# Altium PCB mchf_pro_rf.PcbDoc (part 1 of 4)
Units mm, origin at the board's own origin, x right, y up, seen from the top; angles counter-clockwise.
Board outline 200 x 140.01 mm, 2 copper layers (Top Layer, Bottom Layer); 387 components, 251 nets, 1103 pads, 620 vias.
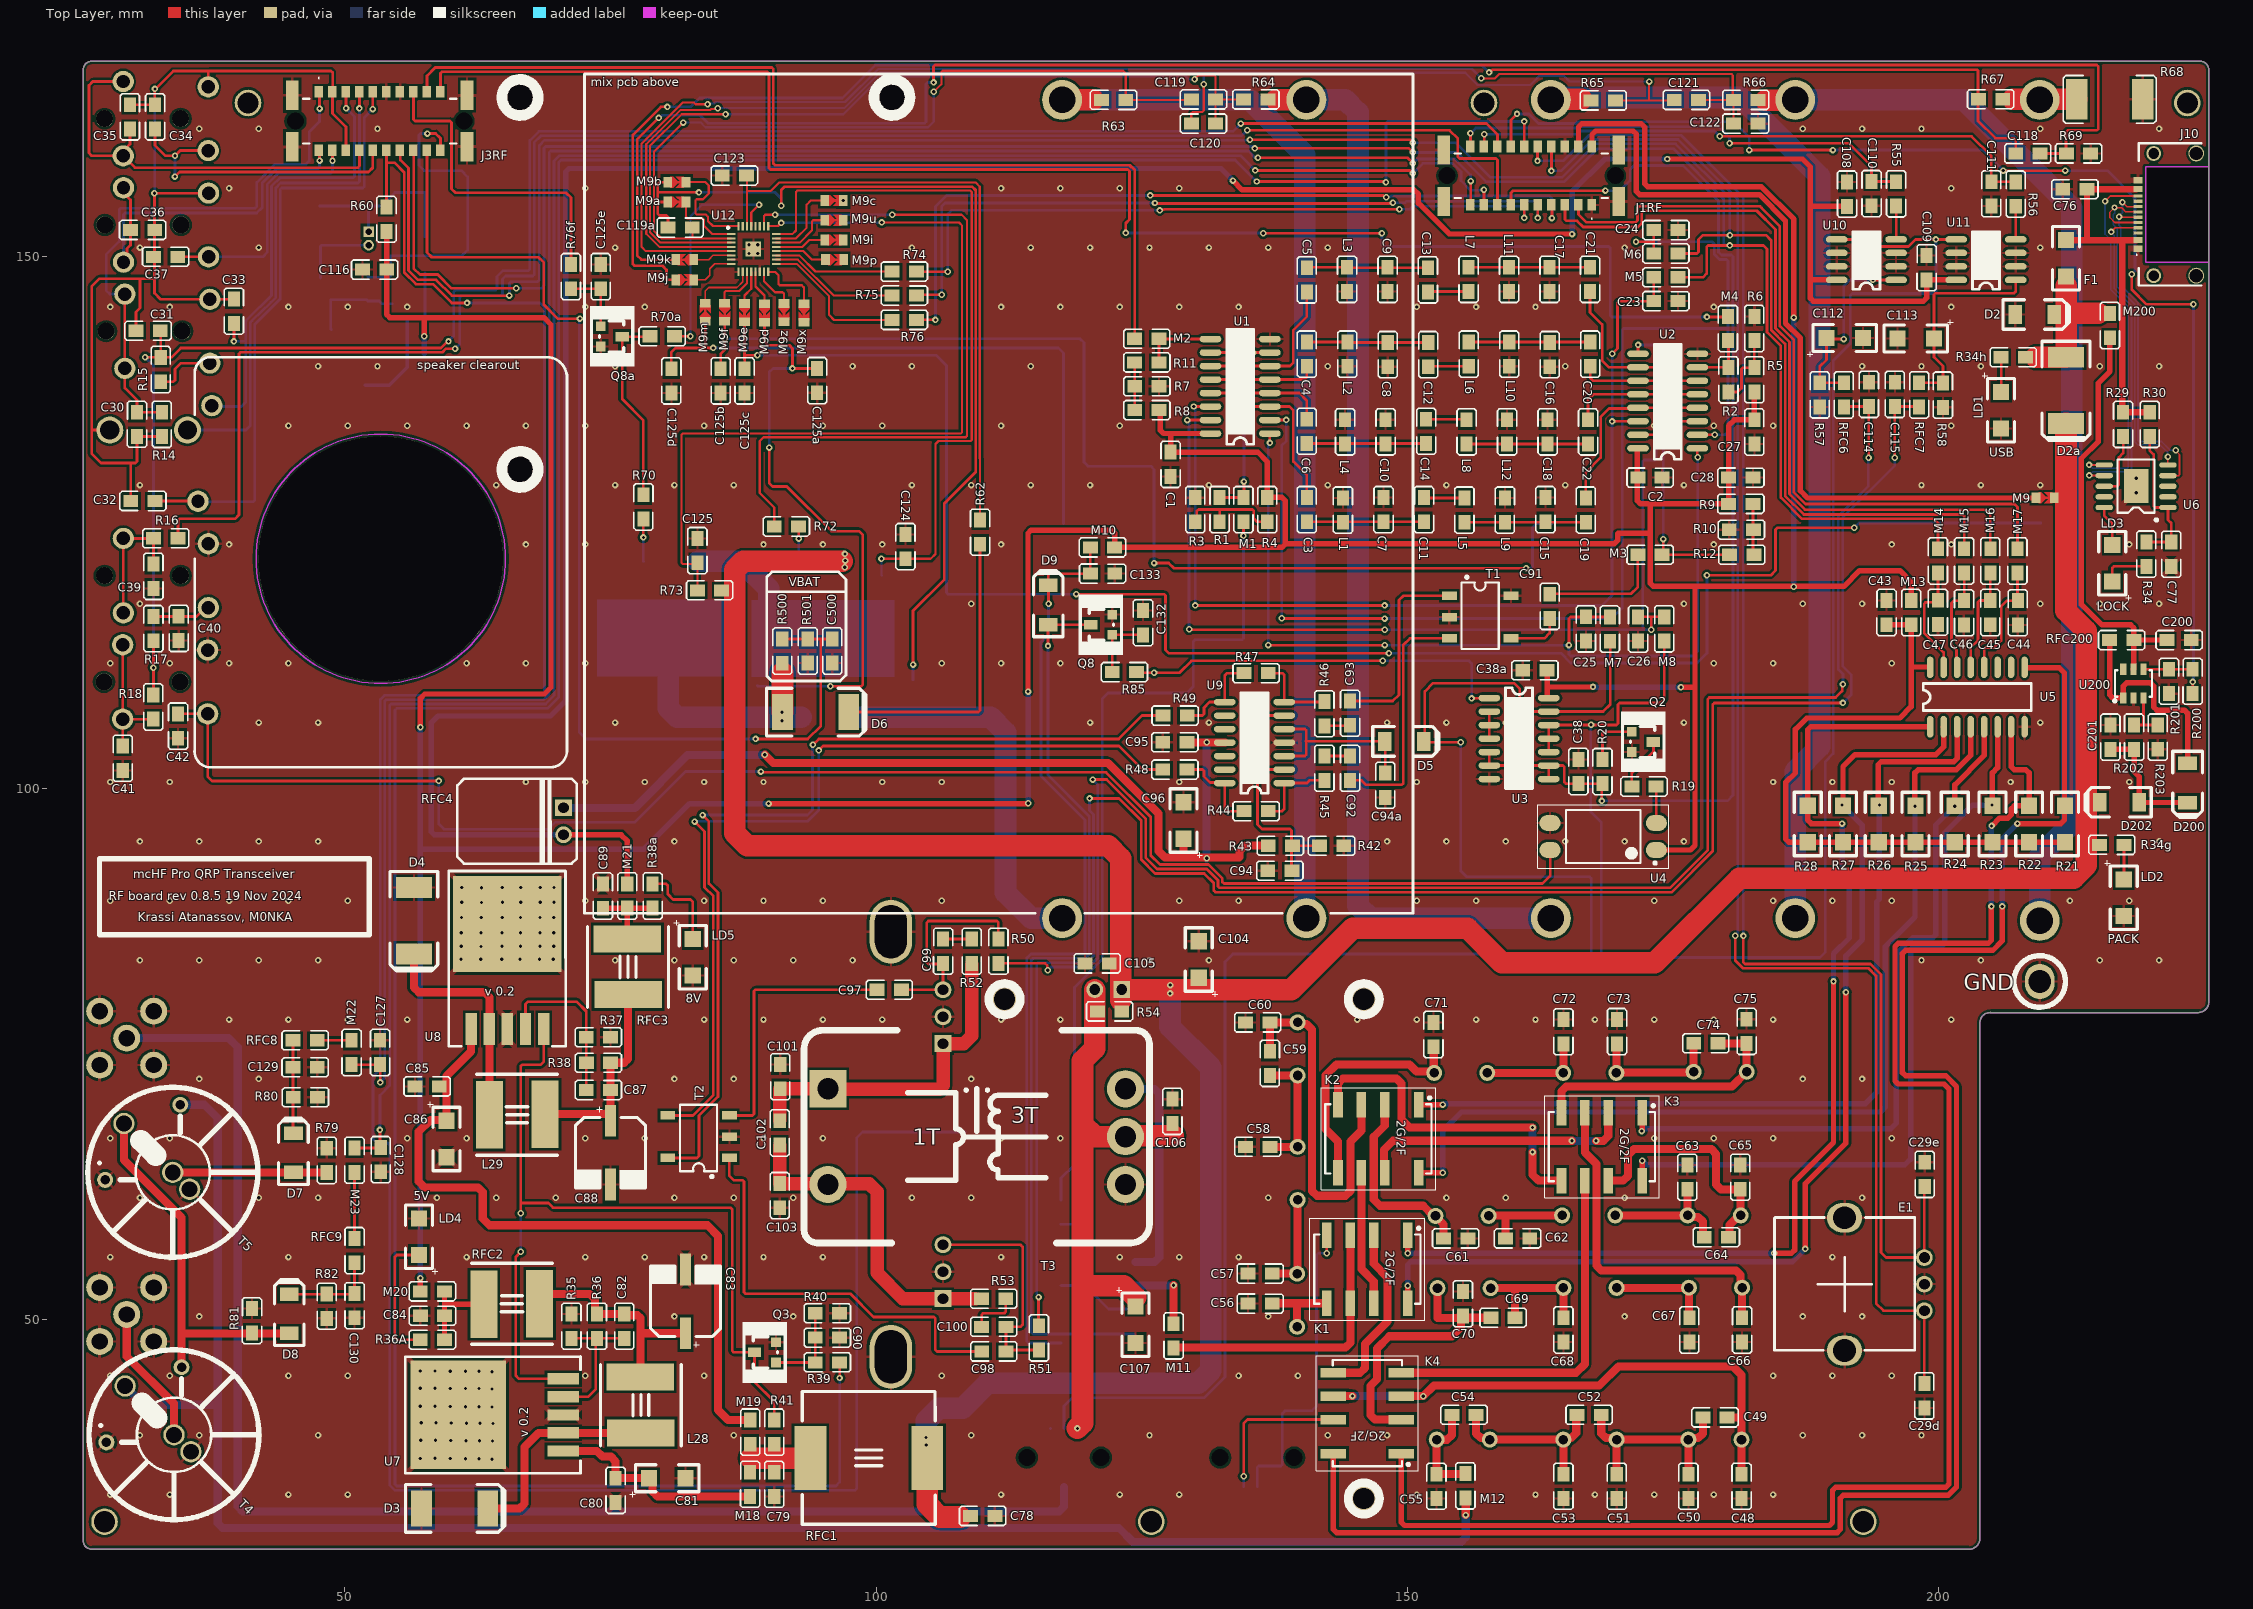
[diagram p0: Top Layer view]
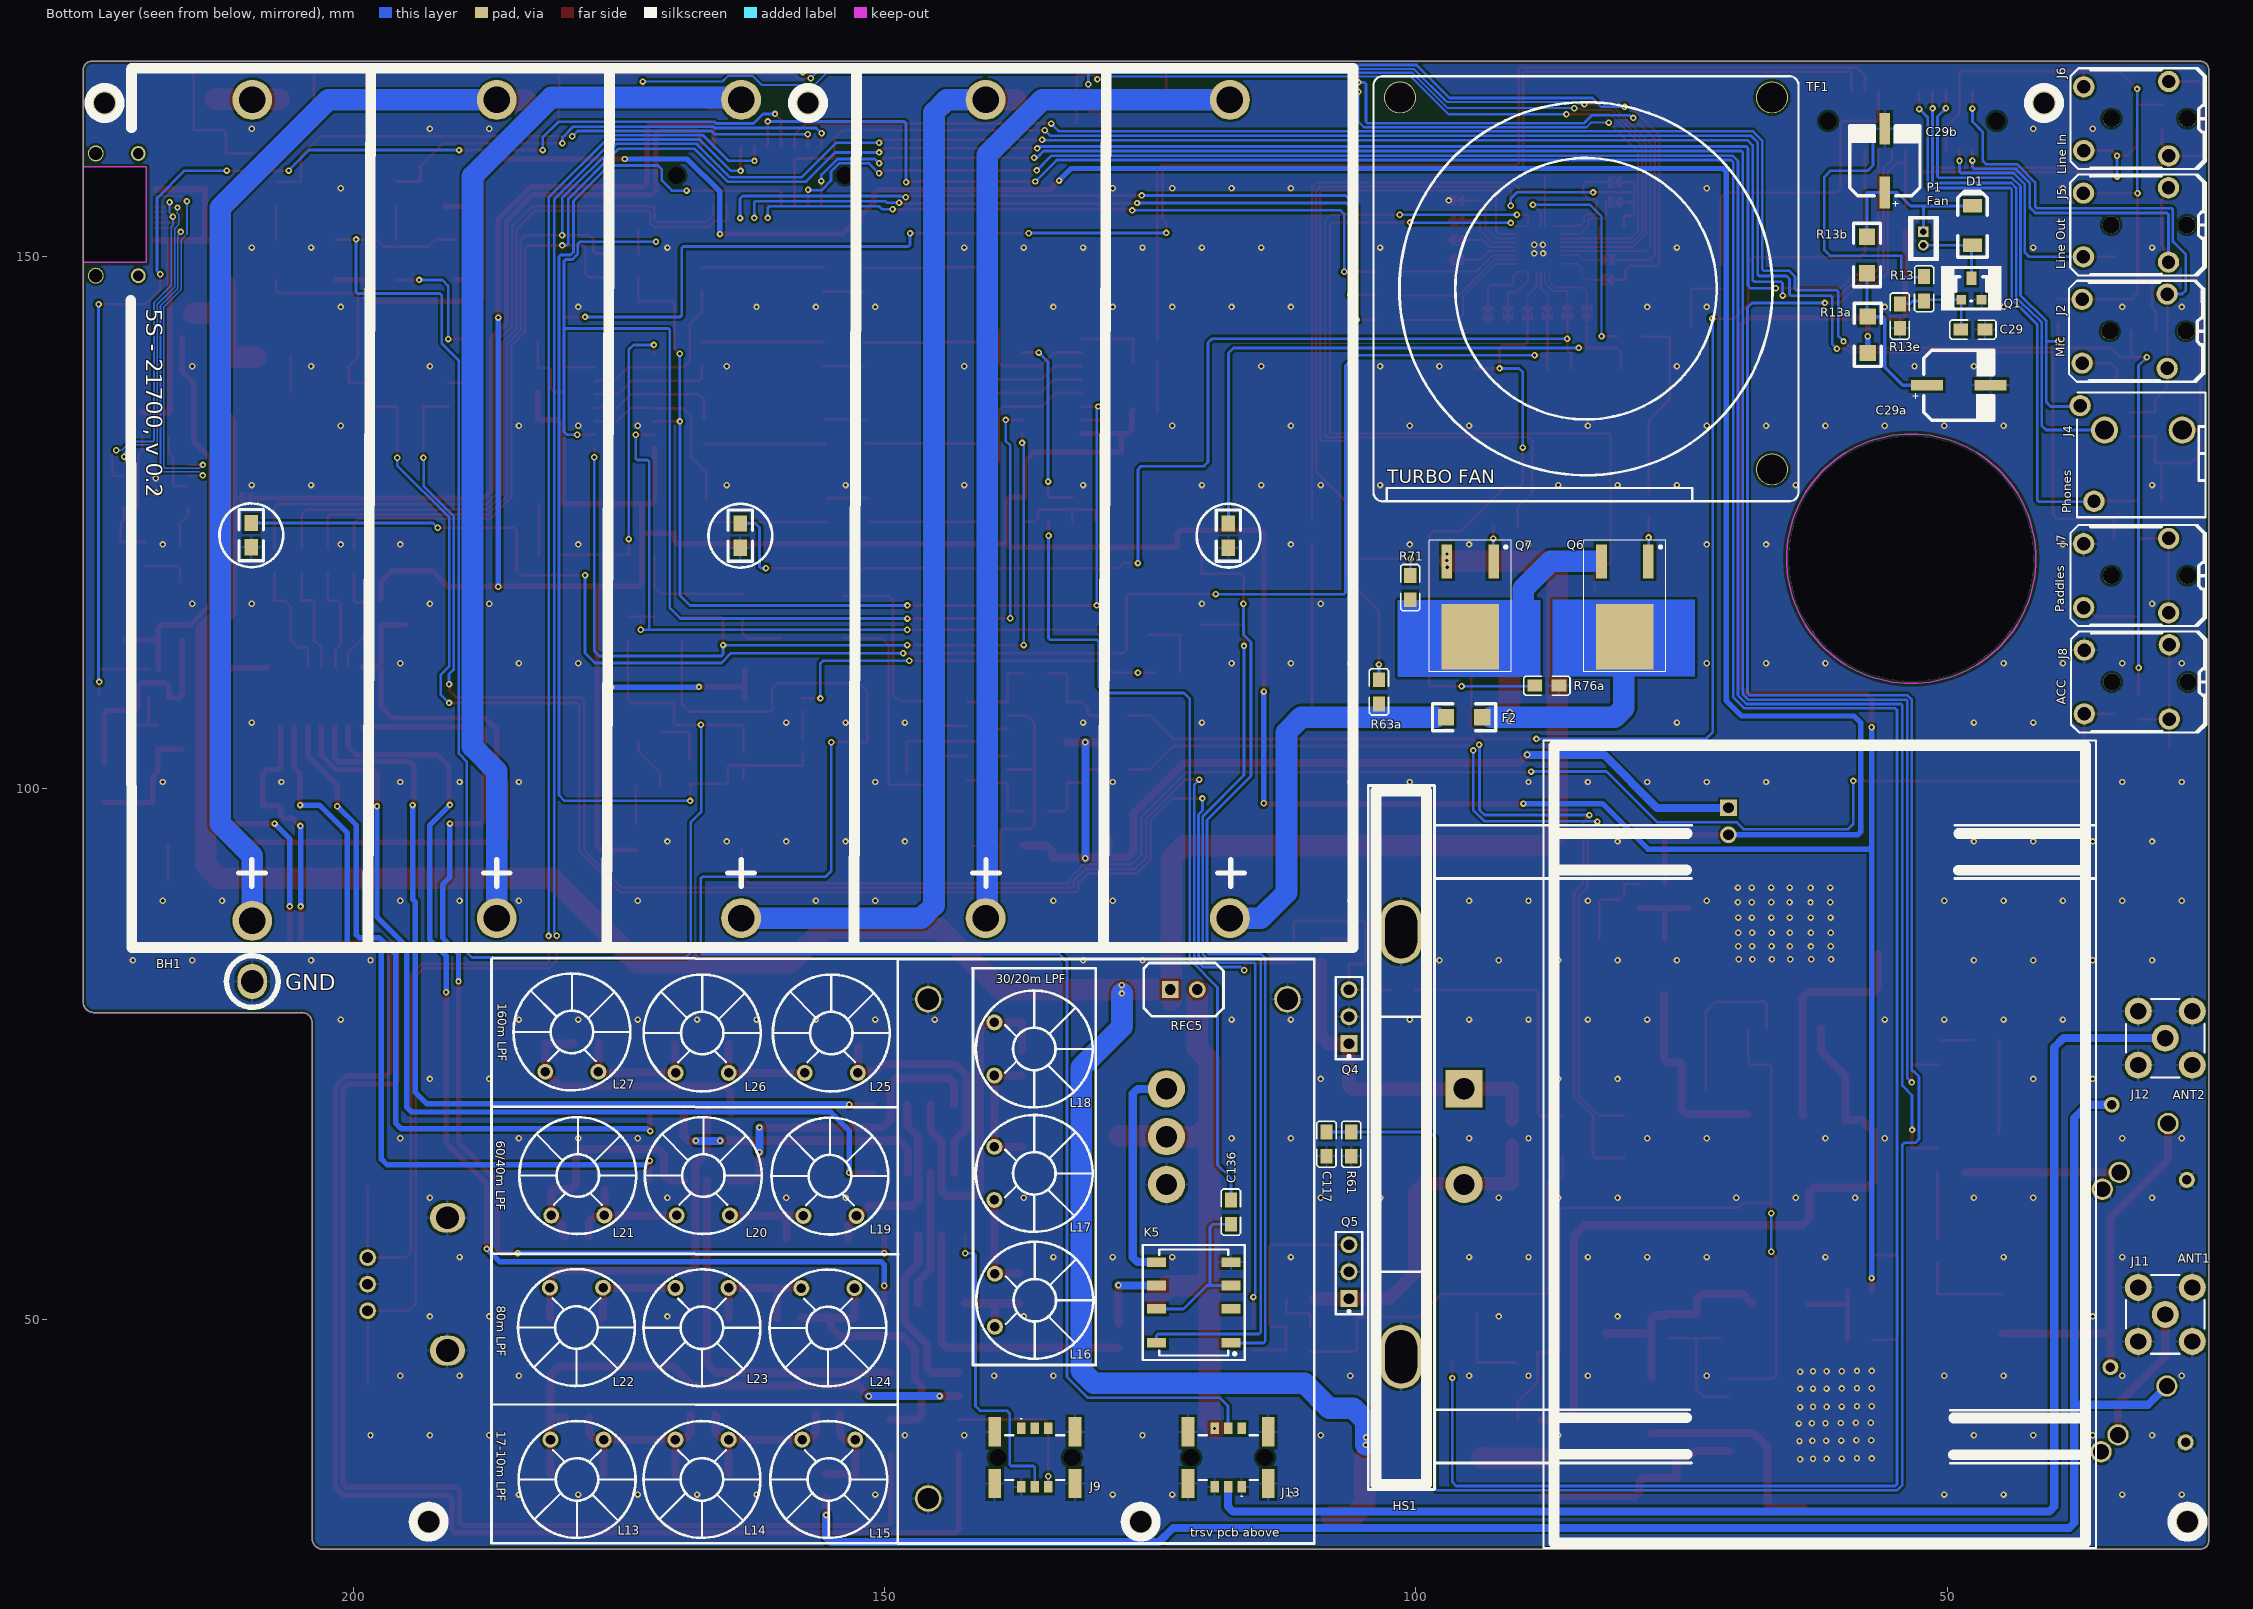
[diagram p1: Bottom Layer view, seen from below]

## Layer stack, top to bottom
Top Solder: solder mask 0.0102, Solder Resist, Dk 3.5
Top Layer: signal copper 0.0356
Dielectric 1: dielectric 0.32, FR-4, Dk 4.8
Bottom Layer: signal copper 0.0356
Bottom Solder: solder mask 0.0102, Solder Resist, Dk 3.5

## Board outline
26.188,28.396 cw(c26.188,29.185) 25.4,29.185 25.4,167.615 cw(c26.188,167.615) 26.188,168.403 224.612,168.403 cw(c224.612,167.615) 225.4,167.615 225.4,79.862 225.399,79.862 cw(c224.411,79.875) 224.399,78.887 224.405,78.89 204.846,78.89 204.858,78.895 ccw(c204.846,77.919) 203.87,77.931 203.869,77.945 203.869,29.394 203.86,29.367 cw(c202.872,29.38) 202.86,28.392 202.86,28.397

## Design rules (kind name [scope] priority, off if disabled: settings)
Clearance Clearance_1 [InPolygon] p1: gap=0.229 ignorepadtopadclearanceinfootprint=FALSE except(0: Arc-Hole Track-Hole SMDPad-Hole THPad-Hole Via-Hole Fill-Hole Poly-Hole Region-Hole Text-Hole)
Clearance [All] p2: gap=0.152 ignorepadtopadclearanceinfootprint=FALSE except(0: Arc-Hole Track-Hole SMDPad-Hole THPad-Hole Via-Hole Fill-Hole Poly-Hole Region-Hole Text-Hole)
DiffPairsRouting [All] p1: maxlimit=7.62 minlimit=0.152 mostfreqgap=0.152 toplayer_minwidth=0.152 toplayer_maxwidth=0.152 toplayer_prefwidth=0.152 bottomlayer_minwidth=0.152 bottomlayer_maxwidth=0.152 bottomlayer_prefwidth=0.152 maxuncoupledlength=3.81
HoleSize [All] p1: absolutevalues=TRUE maxlimit=25.4 minlimit=0.025 maxpercent=80.000 minpercent=20.000
PolygonConnect PolygonConnect_vias [IsVia] p1: connectstyle=Direct reliefconductorwidth=0.254 reliefentries=4 polygonreliefangle="90 Angle" airgapwidth=0.254
PolygonConnect PolygonConnect_J1 [InComponent('J1')] p2: connectstyle=Relief reliefconductorwidth=1.27 reliefentries=4 polygonreliefangle="90 Angle" airgapwidth=0.254
PolygonConnect PolygonConnect_AluCap [InComponent('C74') OR InComponent('C77') OR InComponent('C80') OR InComponent('C83') OR InComponent('C86') OR InComponent('C89') OR InComponent('C147') OR InComponent('C150') OR InComponent('U6')  OR InComponent('U7') OR InComponent('U8') OR InComponent('U9')] p3: connectstyle=Relief reliefconductorwidth=0.508 reliefentries=4 polygonreliefangle="45 Angle" airgapwidth=0.254
PolygonConnect PolygonConnect_P2 [InComponent('P2')] p4: connectstyle=Relief reliefconductorwidth=0.762 reliefentries=4 polygonreliefangle="90 Angle" airgapwidth=0.254
PolygonConnect [All] p5: connectstyle=Relief reliefconductorwidth=0.254 reliefentries=4 polygonreliefangle="90 Angle" airgapwidth=0.254
RoomDefinition "TX/RX SW" [InComponentClass('TX/RX SW')] p1: confinementstyle=ConfineOut formatcopy=TRUE lockcomponents=FALSE outline 26.289,200.787 40.157,200.787 40.157,208.636 26.289,208.636
RoomDefinition "Bandpass filters" [InComponentClass('Bandpass filters')] p2: confinementstyle=ConfineOut formatcopy=TRUE lockcomponents=FALSE outline 105.867,209.398 105.867,212.319 26.416,212.319 26.416,209.398
RoomDefinition "SWR/Power meter" [InComponentClass('SWR/Power meter')] p3: confinementstyle=ConfineOut formatcopy=TRUE lockcomponents=FALSE outline 70.002,178.232 70.002,191.059 41.097,191.059 41.097,178.232
RoomDefinition SMPS [InComponentClass('SMPS')] p4: confinementstyle=ConfineOut formatcopy=TRUE lockcomponents=FALSE outline 26.289,191.745 40.132,191.745 40.132,200.05 26.289,200.05
RoomDefinition BMS [InComponentClass('BMS')] p5: confinementstyle=ConfineOut formatcopy=TRUE lockcomponents=FALSE outline 41.072,191.745 69.977,191.745 69.977,200.05 41.072,200.05
RoomDefinition "Lowpass filters" [InComponentClass('Lowpass filters')] p6: confinementstyle=ConfineOut formatcopy=TRUE lockcomponents=FALSE outline 86.233,200.914 105.969,200.914 105.969,208.813 86.233,208.813
RoomDefinition "TX PA" [InComponentClass('TX PA')] p7: confinementstyle=ConfineOut formatcopy=TRUE lockcomponents=FALSE outline 26.314,178.029 40.107,178.029 40.107,191.135 26.314,191.135
RoomDefinition 160m [InComponentClass('160m')] p8: confinementstyle=ConfineOut formatcopy=TRUE lockcomponents=FALSE outline 84.963,191.719 84.963,200.101 71.018,200.101 71.018,191.719
RoomDefinition 80m [InComponentClass('80m')] p9: confinementstyle=ConfineOut formatcopy=TRUE lockcomponents=FALSE outline 84.861,200.838 84.861,208.763 71.044,208.763 71.044,200.838
RoomDefinition 60/40m [InComponentClass('60/40m')] p10: confinementstyle=ConfineOut formatcopy=TRUE lockcomponents=FALSE outline 84.912,178.13 84.912,190.932 70.993,190.932 70.993,178.13
RoomDefinition 30/20m [InComponentClass('30/20m')] p11: confinementstyle=ConfineOut formatcopy=TRUE lockcomponents=FALSE outline 70.053,200.736 70.053,208.661 57.861,208.661 57.861,200.736
RoomDefinition 17-10m [InComponentClass('17-10m')] p12: confinementstyle=ConfineOut formatcopy=TRUE lockcomponents=FALSE outline 57.328,200.711 57.328,208.661 41.148,208.661 41.148,200.711
RoomDefinition "UI board interface" [InComponentClass('UI board interface')] p13: confinementstyle=ConfineOut formatcopy=TRUE lockcomponents=FALSE outline 105.943,178.13 105.943,200.025 86.081,200.025 86.081,178.13
RoutingVias [All] p1: holewidth=0.381 width=0.762 viastyle="Through Hole" minholewidth=0.711 minwidth=1.27 maxholewidth=0.711 maxwidth=1.27
SilkToSolderMaskClearance SilkscreenOverComponentPads [IsPad] p1: minsilkscreentomaskgap=0.254 clearancetoexposedcopper=TRUE
SolderMaskExpansion SolderMaskExpansion_1 [IsVia] p1: expansion=-0.381 istentingtop=FALSE
SolderMaskExpansion [All] p2: expansion=0.102 istentingtop=FALSE
Width "Schematic Width Constraint_103" [InNet('NetD200_1')] p1: maxlimit=0.508 minlimit=0.508 preferedwidth=0.508
Width "Schematic Width Constraint_102" [InNet('NetC201_1')] p2: maxlimit=0.508 minlimit=0.508 preferedwidth=0.508
Width "Schematic Width Constraint_101" [InNet('NetC200_2')] p3: maxlimit=0.508 minlimit=0.508 preferedwidth=0.508
Width "Schematic Width Constraint_100" [InNet('NetJ10_A5')] p4: maxlimit=0.152 minlimit=0.152 preferedwidth=0.152
Width "Schematic Width Constraint_99" [InNet('NetJ10_B5')] p5: maxlimit=0.152 minlimit=0.152 preferedwidth=0.152
Width "Schematic Width Constraint_98" [InNet('DP')] p6: maxlimit=0.152 minlimit=0.152 preferedwidth=0.152
Width "Schematic Width Constraint_97" [InNet('DM')] p7: maxlimit=0.152 minlimit=0.152 preferedwidth=0.152
Width "Schematic Width Constraint_96" [InNet('USB_20V')] p8: maxlimit=2.032 minlimit=2.032 preferedwidth=2.032
Width "Schematic Width Constraint_95" [InNet('NetM9a_2')] p9: maxlimit=0.203 minlimit=0.203 preferedwidth=0.203
Width "Schematic Width Constraint_94" [InNet('NetM9p_1')] p10: maxlimit=0.203 minlimit=0.203 preferedwidth=0.203
Width "Schematic Width Constraint_92" [InNet('NetM9x_1')] p11: maxlimit=0.203 minlimit=0.203 preferedwidth=0.203
Width "Schematic Width Constraint_91" [InNet('NetM9b_2')] p12: maxlimit=0.203 minlimit=0.203 preferedwidth=0.203
Width "Schematic Width Constraint_90" [InNet('NetM9i_1')] p13: maxlimit=0.203 minlimit=0.203 preferedwidth=0.203
Width "Schematic Width Constraint_87" [InNet('NetM9c_1')] p14: maxlimit=0.203 minlimit=0.203 preferedwidth=0.203
Width "Schematic Width Constraint_74" [InNet('NetM9z_1')] p15: maxlimit=0.203 minlimit=0.203 preferedwidth=0.203
Width "Schematic Width Constraint_59" [InNet('NetM9u_1')] p16: maxlimit=0.203 minlimit=0.203 preferedwidth=0.203
Width "Schematic Width Constraint_54" [InNet('NetM9e_1')] p17: maxlimit=0.203 minlimit=0.203 preferedwidth=0.203
Width "Schematic Width Constraint_52" [InNet('NetC29a_1')] p18: maxlimit=0.305 minlimit=0.305 preferedwidth=0.305
Width "Schematic Width Constraint_53" [InNet('NetK5_5')] p19: maxlimit=0.762 minlimit=0.762 preferedwidth=0.762
Width "Schematic Width Constraint_86" [InNet('SRN')] p20: maxlimit=0.152 minlimit=0.152 preferedwidth=0.152
Width "Schematic Width Constraint_85" [InNet('NetM9m_2')] p21: maxlimit=0.152 minlimit=0.152 preferedwidth=0.152
Width "Schematic Width Constraint_56" [InNet('SRP')] p22: maxlimit=0.152 minlimit=0.152 preferedwidth=0.152
Width "Schematic Width Constraint_82" [InNet('NetJ12_1')] p23: maxlimit=0.762 minlimit=0.762 preferedwidth=0.762
Width "Schematic Width Constraint_80" [InNet('NetJ1RF_A11')] p24: maxlimit=2.032 minlimit=0.508 preferedwidth=0.508
Width "Schematic Width Constraint_78" [InNet('NetR74_1')] p25: maxlimit=0.203 minlimit=0.203 preferedwidth=0.203
Width "Schematic Width Constraint_77" [InNet('NetM9d_1')] p26: maxlimit=0.203 minlimit=0.203 preferedwidth=0.203
Width "Schematic Width Constraint_76" [InNet('NetC119_2')] p27: maxlimit=0.203 minlimit=0.203 preferedwidth=0.203
Width "Schematic Width Constraint_72" [InNet('NetR70a_1')] p28: maxlimit=0.203 minlimit=0.203 preferedwidth=0.203
Width "Schematic Width Constraint_71" [InNet('NetR72_1')] p29: maxlimit=0.203 minlimit=0.203 preferedwidth=0.203
Width "Schematic Width Constraint_70" [InNet('NetR76_1')] p30: maxlimit=0.203 minlimit=0.203 preferedwidth=0.203
Width "Schematic Width Constraint_69" [InNet('NetC120_2')] p31: maxlimit=0.203 minlimit=0.203 preferedwidth=0.203
Width "Schematic Width Constraint_67" [InNet('NetC124_2')] p32: maxlimit=0.203 minlimit=0.203 preferedwidth=0.203
Width "Schematic Width Constraint_66" [InNet('NetM9f_1')] p33: maxlimit=0.203 minlimit=0.203 preferedwidth=0.203
Width "Schematic Width Constraint_64" [InNet('NetC119_1')] p34: maxlimit=0.203 minlimit=0.203 preferedwidth=0.203
Width "Schematic Width Constraint_58" [InNet('NetC121_2')] p35: maxlimit=0.203 minlimit=0.203 preferedwidth=0.203
Width "Schematic Width Constraint_57" [InNet('NetC125_1')] p36: maxlimit=0.203 minlimit=0.203 preferedwidth=0.203
Width "Schematic Width Constraint_55" [InNet('NetC123_2')] p37: maxlimit=0.203 minlimit=0.203 preferedwidth=0.203
Width "Schematic Width Constraint_48" [InNet('NetR75_1')] p38: maxlimit=0.203 minlimit=0.203 preferedwidth=0.203
Width "Schematic Width Constraint_46" [InNet('VBAT_F')] p39: maxlimit=2.032 minlimit=2.032 preferedwidth=2.032
Width "Schematic Width Constraint_3" [InNet('NetQ6_3')] p40: maxlimit=2.032 minlimit=2.032 preferedwidth=2.032
Width "Schematic Width Constraint_49" [InNet('NetC79_2')] p41: maxlimit=2.032 minlimit=2.032 preferedwidth=2.032
Width "Schematic Width Constraint_44" [InNet('NetC76_2')] p42: maxlimit=0.61 minlimit=0.61 preferedwidth=0.61
Width "Schematic Width Constraint_9" [InNet('NetBH1_2')] p43: maxlimit=2.032 minlimit=2.032 preferedwidth=2.032
Width "Schematic Width Constraint_47" [InNet('NetD7_1')] p44: maxlimit=0.762 minlimit=0.762 preferedwidth=0.762
Width "Schematic Width Constraint_41" [InNet('NetJ11_1')] p45: maxlimit=0.762 minlimit=0.762 preferedwidth=0.762
Width "Schematic Width Constraint_12" [InNet('NetD8_1')] p46: maxlimit=0.762 minlimit=0.762 preferedwidth=0.762
Width "Schematic Width Constraint_8" [InNet('GND')] p47: maxlimit=0.762 minlimit=0.762 preferedwidth=0.762
Width "Schematic Width Constraint_4" [InNet('NetM12_2')] p48: maxlimit=0.762 minlimit=0.762 preferedwidth=0.762
Width "Schematic Width Constraint_73" [InNet('NetC43_1')] p49: maxlimit=0.508 minlimit=0.508 preferedwidth=0.508
Width "Schematic Width Constraint_65" [InNet('NetBH1_10')] p50: maxlimit=2.032 minlimit=2.032 preferedwidth=2.032
Width "Schematic Width Constraint_75" [InNet('PACK_P')] p51: maxlimit=2.032 minlimit=2.032 preferedwidth=2.032
Width "Schematic Width Constraint_51" [InNet('VCC_8V')] p52: maxlimit=0.508 minlimit=0.508 preferedwidth=0.508
Width "Schematic Width Constraint_40" [InNet('VCC_5V')] p53: maxlimit=0.508 minlimit=0.508 preferedwidth=0.508
Width "Schematic Width Constraint_93" [InNet('NetC80_1')] p54: maxlimit=0.762 minlimit=0.762 preferedwidth=0.762
Width "Schematic Width Constraint_89" [InNet('NetC85_1')] p55: maxlimit=0.762 minlimit=0.762 preferedwidth=0.762
Width "Schematic Width Constraint_88" [InNet('NetC89_1')] p56: maxlimit=0.508 minlimit=0.508 preferedwidth=0.508
Width "Schematic Width Constraint_79" [InNet('TRX_20V')] p57: maxlimit=2.032 minlimit=2.032 preferedwidth=2.032
Width "Schematic Width Constraint_84" [InNet('NetC102_2')] p58: maxlimit=1.27 minlimit=1.27 preferedwidth=1.27
Width "Schematic Width Constraint_83" [InNet('NetC101_2')] p59: maxlimit=1.27 minlimit=1.27 preferedwidth=1.27
Width "Schematic Width Constraint_81" [InNet('NetC95_2')] p60: maxlimit=0.762 minlimit=0.762 preferedwidth=0.762
Width "Schematic Width Constraint_68" [InNet('NetBH1_1')] p61: maxlimit=2.032 minlimit=2.032 preferedwidth=2.032
Width "Schematic Width Constraint_63" [InNet('NetC87_2')] p62: maxlimit=0.762 minlimit=0.762 preferedwidth=0.762
Width "Schematic Width Constraint_62" [InNet('NetD4_2')] p63: maxlimit=0.762 minlimit=0.762 preferedwidth=0.762
Width "Schematic Width Constraint_61" [InNet('NetC82_2')] p64: maxlimit=0.762 minlimit=0.762 preferedwidth=0.762
Width "Schematic Width Constraint_60" [InNet('NetD3_2')] p65: maxlimit=0.762 minlimit=0.762 preferedwidth=0.762
Width "Schematic Width Constraint_50" [InNet('NetC84_1')] p66: maxlimit=0.508 minlimit=0.508 preferedwidth=0.508
Width "Schematic Width Constraint_45" [InNet('NetBH1_4')] p67: maxlimit=2.032 minlimit=2.032 preferedwidth=2.032
Width "Schematic Width Constraint_43" [InNet('NetBH1_8')] p68: maxlimit=2.032 minlimit=2.032 preferedwidth=2.032
Width "Schematic Width Constraint_42" [InNet('NetBH1_6')] p69: maxlimit=2.032 minlimit=2.032 preferedwidth=2.032
Width "Schematic Width Constraint_39" [InNet('K3A')] p70: maxlimit=0.508 minlimit=0.508 preferedwidth=0.508
Width "Schematic Width Constraint_37" [InNet('K4K')] p71: maxlimit=0.508 minlimit=0.508 preferedwidth=0.508
Width "Schematic Width Constraint_36" [InNet('K2A')] p72: maxlimit=0.508 minlimit=0.508 preferedwidth=0.508
Width "Schematic Width Constraint_35" [InNet('K4A')] p73: maxlimit=0.508 minlimit=0.508 preferedwidth=0.508
Width "Schematic Width Constraint_27" [InNet('K2K')] p74: maxlimit=0.508 minlimit=0.508 preferedwidth=0.508
Width "Schematic Width Constraint_21" [InNet('K1K')] p75: maxlimit=0.508 minlimit=0.508 preferedwidth=0.508
Width "Schematic Width Constraint_13" [InNet('K3K')] p76: maxlimit=0.508 minlimit=0.508 preferedwidth=0.508
Width "Schematic Width Constraint_2" [InNet('K1A')] p77: maxlimit=0.508 minlimit=0.508 preferedwidth=0.508
Width "Schematic Width Constraint_38" [InNet('NetK5_6')] p78: maxlimit=0.762 minlimit=0.762 preferedwidth=0.762
Width "Schematic Width Constraint_34" [InNet('NetK1_3')] p79: maxlimit=0.762 minlimit=0.762 preferedwidth=0.762
Width "Schematic Width Constraint_33" [InNet('NetK1_7')] p80: maxlimit=0.762 minlimit=0.762 preferedwidth=0.762
Width "Schematic Width Constraint_32" [InNet('NetK2_4')] p81: maxlimit=0.762 minlimit=0.762 preferedwidth=0.762
Width "Schematic Width Constraint_31" [InNet('NetK2_7')] p82: maxlimit=0.762 minlimit=0.762 preferedwidth=0.762
Width "Schematic Width Constraint_1" [InNet('NetK1_2')] p83: maxlimit=0.762 minlimit=0.762 preferedwidth=0.762
Width "Schematic Width Constraint" [InNet('NetK3_6')] p84: maxlimit=0.762 minlimit=0.762 preferedwidth=0.762
Width "Schematic Width Constraint_30" [InNet('NetC73_1')] p85: maxlimit=0.762 minlimit=0.762 preferedwidth=0.762
Width "Schematic Width Constraint_29" [InNet('NetC64_1')] p86: maxlimit=0.762 minlimit=0.762 preferedwidth=0.762
Width "Schematic Width Constraint_28" [InNet('NetC61_2')] p87: maxlimit=0.762 minlimit=0.762 preferedwidth=0.762
Width "Schematic Width Constraint_26" [InNet('NetC63_2')] p88: maxlimit=0.762 minlimit=0.762 preferedwidth=0.762
Width "Schematic Width Constraint_25" [InNet('NetC67_1')] p89: maxlimit=0.762 minlimit=0.762 preferedwidth=0.762
Width "Schematic Width Constraint_24" [InNet('NetC72_1')] p90: maxlimit=0.762 minlimit=0.762 preferedwidth=0.762
Width "Schematic Width Constraint_23" [InNet('NetC69_1')] p91: maxlimit=0.762 minlimit=0.762 preferedwidth=0.762
Width "Schematic Width Constraint_22" [InNet('NetC57_2')] p92: maxlimit=0.762 minlimit=0.762 preferedwidth=0.762
Width "Schematic Width Constraint_20" [InNet('NetC62_2')] p93: maxlimit=0.762 minlimit=0.762 preferedwidth=0.762
Width "Schematic Width Constraint_19" [InNet('NetC58_2')] p94: maxlimit=0.762 minlimit=0.762 preferedwidth=0.762
Width "Schematic Width Constraint_18" [InNet('NetC59_1')] p95: maxlimit=0.762 minlimit=0.762 preferedwidth=0.762
Width "Schematic Width Constraint_17" [InNet('NetC68_1')] p96: maxlimit=0.762 minlimit=0.762 preferedwidth=0.762
Width "Schematic Width Constraint_16" [InNet('NetC74_1')] p97: maxlimit=0.762 minlimit=0.762 preferedwidth=0.762
Width "Schematic Width Constraint_15" [InNet('NetC71_1')] p98: maxlimit=0.762 minlimit=0.762 preferedwidth=0.762
Width "Schematic Width Constraint_14" [InNet('NetC56_2')] p99: maxlimit=0.762 minlimit=0.762 preferedwidth=0.762
Width "Schematic Width Constraint_11" [InNet('NetC54_1')] p100: maxlimit=0.762 minlimit=0.762 preferedwidth=0.762
Width "Schematic Width Constraint_10" [InNet('NetC52_1')] p101: maxlimit=0.762 minlimit=0.762 preferedwidth=0.762
Width "Schematic Width Constraint_7" [InNet('NetC66_1')] p102: maxlimit=0.762 minlimit=0.762 preferedwidth=0.762
Width "Schematic Width Constraint_6" [InNet('NetC48_2')] p103: maxlimit=0.762 minlimit=0.762 preferedwidth=0.762
Width "Schematic Width Constraint_5" [InNet('NetC49_1')] p104: maxlimit=0.762 minlimit=0.762 preferedwidth=0.762
Width Width_PIN [(InNet('NetC78_1'))OR(InNet('NetC81_2'))] p105: maxlimit=3.175 minlimit=3.175 preferedwidth=3.175
Width [All] p106: maxlimit=0.254 minlimit=0.254 preferedwidth=0.254
27 further rules are at their usual default settings.

## Classes and differential pairs
component class "SWR/Power meter": C127 C128 C129 C130 D7 D8 J11 J12 J13 M22 M23 R79 R80 R81 R82 RFC8 RFC9 T4 T5
component class "TX/RX SW": C132 C133 C136 D9 K5 M10 Q8 R85
component class SMPS: C76 C77 C78 C79 C80 C81 C82 C83 C84 C85 C86 C87 C88 C89 C90 C200 C201 D2 D2a D3 D4 D200 D202 F1 J10 L28 L29 LD1 LD2 LD3 LD4 LD5 M18 M19 M20 M21 M200 Q3 R29 R30 R34 R34g R34h R35 R36 R36A R37 R38 R38a R39 R40 R41 R200 R201 R202 R203 RFC1 RFC2 RFC3 RFC200 U6 U7 U8 U200
component class BMS: BH1 C118 C119 C119a C120 C121 C122 C123 C124 C125 C125a C125b C125c C125d C125e D6 F2 M9a M9b M9c M9d M9e M9f M9i M9j M9k M9m M9p M9u M9x M9z Q6 Q7 Q8a R62 R63 R63a R64 R65 R66 R67 R68 R69 R70 R70a R71 R72 R73 R74 R75 R76 R76a R76f U12
component class 160m: C71 C72 C73 C74 C75 L25 L26 L27
component class 80m: C66 C67 C68 C69 C70 L22 L23 L24
component class 60/40m: C61 C62 C63 C64 C65 L19 L20 L21
component class 30/20m: C56 C57 C58 C59 C60 L16 L17 L18
component class 17-10m: C48 C49 C50 C51 C52 C53 C54 C55 L13 L14 L15
component class "UI board interface": C29 C29a C29b C29d C29e C30 C31 C32 C33 C34 C35 C36 C37 C38 C38a C39 C40 C41 C42 C500 D1 E1 J1RF J2 J3RF J4 J5 J6 J7 J8 M9 P1 Q1 Q2 R13 R13a R13b R13e R14 R15 R16 R17 R18 R19 R20 R500 R501 TF1 U3 U4
component class "TX PA": C91 C92 C93 C94 C94a C95 C96 C97 C98 C99 C100 C101 C102 C103 C104 C105 C106 C107 C108 C109 C110 C111 C112 C113 C114 C115 C116 C117 D5 HS1 Q4 Q5 R42 R43 R44 R45 R46 R47 R48 R49 R50 R51 R52 R53 R54 R55 R56 R57 R58 R60 R61 RFC4 RFC5 RFC6 RFC7 T1 T2 T3 U9 U10 U11
component class "Lowpass filters": C43 C44 C45 C46 C47 C63b J9 K1 K2 K3 K4 M11 M12 M13 M14 M15 M16 M17 R21 R22 R23 R24 R25 R26 R27 R28 U5
component class "Bandpass filters": C1 C2 C3 C4 C5 C6 C7 C8 C9 C10 C11 C12 C13 C14 C15 C16 C17 C18 C19 C20 C21 C22 C23 C24 C25 C26 C27 C28 L1 L2 L3 L4 L5 L6 L7 L8 L9 L10 L11 L12 M1 M2 M3 M4 M5 M6 M7 M8 R1 R2 R3 R4 R5 R6 R7 R8 R9 R10 R11 R12 U1 U2

## Components (designator, comment, footprint, x,y, rotation, side; value= is the part's Value field where it differs from the comment)
BH1 "LiOn 5S 21700" BATT_HOLDER_5S 151,123.77 r0 bottom locked
C1 "100nF" 0805 127.706,131.645 r270 top
C2 "100nF" 0805 171.663,129.22 r0 top
C3 "100nF" 0805 140.542,125.048 r90 top
C4 "100nF" 0805 140.533,142.016 r270 top
C5 "100nF" 0805 140.533,149 r270 top
C6 "100nF" 0805 140.533,132.414 r90 top
C7 "1.5nF" 0805 147.755,125.048 r90 top
C8 "820pF" 0805 148.143,141.964 r270 top
C9 "390pF" 0805 148.136,146.714 r90 top
C10 "180pF" 0805 147.94,134.7 r270 top
C11 "680pF" 0805 151.565,125.048 r90 top
C12 "390pF" 0805 151.953,141.964 r270 top
C13 "180pF" 0805 151.928,149 r270 top
C14 "82pF" 0805 151.769,132.414 r90 top
C15 "1.5nF" 0805 162.995,125.048 r90 top
C16 "820pF" 0805 163.383,141.964 r270 top
C17 "390pF" 0805 163.376,146.714 r90 top
C18 "180pF" 0805 163.18,134.7 r270 top
C19 "100nF" 0805 166.787,127.334 r270 top
C20 "100nF" 0805 167.212,139.678 r90 top
C21 "100nF" 0805 167.186,146.714 r90 top
C22 "100nF" 0805 166.99,134.7 r270 top
C23 "100nF" 0805 173.154,145.829 r0 top
C24 "100nF" 0805 173.154,152.52 r0 top
C25 "100nF" 0805 166.799,116.155 r270 top
C26 "100nF" 0805 171.698,116.147 r270 top
C27 "100nF" 0805 182.642,134.686 r270 top
C28 "100nF" 0805 180.207,129.22 r0 top
C29 "100nF" 0805 48.756,143.147 r180 bottom
C29a "220uF" CAP_ALUM_Pro 48.92,137.922 r180 bottom
C29b "220uF" CAP_ALUM_Pro 55.88,159.056 r90 bottom
C29d "1nF" 0805 198.638,43.989 r270 top
C29e "1nF" 0805 198.68,62.496 r90 top
C30 "1nF" 0805 30.46,133.074 r90 top
C31 "1nF" 0805 32.661,143.058 r180 top
C32 "1nF" 0805 32.178,127.031 r180 top
C33 "1nF" 0805 39.568,146.046 r270 top
C34 "1nF" 0805 32.152,164.334 r270 top
C35 "1nF" 0805 29.789,164.334 r270 top
C36 "1nF" 0805 32.153,152.533 r180 top
C37 "1nF" 0805 31.982,149.994 r0 top
C38 "100nF" 0805 166.096,100.406 r90 top
C38a "100nF" 0805 163.166,111.105 r180 top
C39 "1nF" 0805 31.998,121.104 r270 top
C40 "1nF" 0805 34.382,113.868 r90 top
C41 "1nF" 0805 29.103,103.984 r270 top
C42 "1nF" 0805 34.321,104.677 r90 top
C43 "100nF" 0805 195.086,115.362 r90 top
C44 "100nF" 0805 207.446,115.34 r90 top
C45 "100nF" 0805 204.851,115.362 r90 top
C46 "100nF" 0805 202.387,115.34 r90 top
C47 "100nF" 0805 199.921,115.384 r90 top
C48 "47pF" 0805 181.447,33.139 r90 top
C49 "18pF" 0805 177.778,40.787 r0 top
C50 "100pF" 0805 176.445,33.142 r90 top
C51 "10pF" 0805 169.701,33.139 r90 top
C52 "100pF" 0805 165.931,41.03 r0 top
C53 "100pF" 0805 164.68,33.139 r90 top
C54 "100pF" 0805 154.159,41.03 r0 top
C55 "2pF" 0805 152.729,33.142 r90 top
C56 "180pF" 0805 134.979,51.495 r0 top
C57 "390pF" 0805 134.979,54.325 r0 top
C58 "390pF" 0805 134.75,66.248 r0 top
C59 "100pF" 0805 137.052,75.271 r270 top
C60 "180pF" 0805 134.75,77.958 r0 top
C61 "270pF" 0805 155.708,57.638 r180 top
C62 "680pF" 0805 161.532,57.638 r180 top
C63 "680pF" 0805 176.335,64.563 r270 top
C64 "180pF" 0805 180.238,57.755 r180 top
C65 "270pF" 0805 181.315,64.563 r270 top
C66 "470pF" 0805 181.488,50.187 r270 top
C67 "1.2nF" 0805 176.524,50.187 r270 top
C68 "1.2nF" 0805 164.677,50.187 r270 top
C69 "220pF" 0805 157.831,50.165 r0 top
C70 "470pF" 0805 155.225,50.321 r90 top
C71 "820pF" 0805 152.449,75.656 r90 top
C72 "2.2nF" 0805 164.683,75.916 r90 top
C73 "2.2nF" 0805 169.728,75.924 r90 top
C74 "390pF" 0805 179.244,76.002 r180 top
C75 "820pF" 0805 181.926,75.946 r90 top
C76 "100nF" 0805 211.64,156.358 r0 top locked
C77 "10uF" 0805 221.872,123.184 r270 top
C78 "100nF" 0805 111.198,31.527 r180 top
C79 "100nF" 0805 90.43,33.328 r90 top
C80 "100nF" 0805 75.483,35.094 r270 top
C81 "22uF" 1206_Elec_Cap 78.622,35.07 r0 top
C82 "DNI" 0805 76.307,48.208 r90 top
C83 "220uF" CAP_ALUM_Pro 82.073,51.709 r90 top
C84 "100nF" 0805 59.425,50.363 r180 top
C85 "100nF" 0805 58.924,71.938 r180 top
C86 "22uF" 1206_Elec_Cap 59.583,68.729 r270 top
C87 "DNI" 0805 72.707,71.597 r0 top
C88 "220uF" CAP_ALUM_Pro 75.014,65.707 r270 top
C89 "100nF" 0805 74.303,88.684 r90 top
C90 "100nF" 0805 94.255,48.291 r0 top
C91 "100nF" 0805 163.395,115.938 r90 top
C92 "100nF" 0805 144.608,100.715 r90 top
C93 "100nF" 0805 144.597,108.226 r270 top
C94 "100nF" 0805 136.83,92.227 r0 top
C94a "100nF" 0805 147.92,99.109 r90 top
C95 "100nF" 0805 126.953,104.312 r0 top
C96 "22uF" 1206_Elec_Cap 128.936,95.228 r90 top
C97 "100nF" 0805 102.409,81.046 r180 top
C98 "100nF" 0805 112.247,47.008 r180 top
C99 "10nF" 0805 106.316,83.493 r90 top
C100 "10nF" 0805 112.239,49.322 r180 top
C101 "560pF" 0805 90.977,74.02 r270 top
C102 "330pF" 0805 90.926,68.729 r270 top
C103 "560pF" 0805 90.926,62.836 r270 top
C104 "10uF" 1206_Elec_Cap 130.371,82.147 r90 top
C105 "100nF" 0805 119.638,83.51 r0 top
C106 "100nF" 0805 127.883,70.761 r270 top
C107 "22uF" 1206_Elec_Cap 124.404,51.254 r270 top
C108 "100nF" 0805 191.374,154.732 r90 top
C109 "100nF" 0805 198.862,147.806 r90 top
C110 "100nF" 0805 193.669,157.121 r270 top
C111 "100nF" 0805 204.953,154.762 r90 top
C112 "22uF" 1206_Elec_Cap 189.411,142.361 r0 top
C113 "22uF" 1206_Elec_Cap 199.572,142.322 r180 top
C114 "100nF" 0805 193.424,138.223 r270 top
C115 "100nF" 0805 195.862,138.223 r270 top
C116 "100nF" 0805 51.643,148.797 r0 top
C117 "100nF" 0805 108.421,67.668 r270 bottom
C118 "100nF" 0805 209.546,159.736 r180 top
C119 "100nF" 0805 129.645,164.806 r0 top
C119a "100nF" 0805 80.402,152.751 r0 top
C120 "100nF" 0805 131.974,162.549 r180 top
C121 "100nF" 0805 175.089,164.764 r0 top
C122 "100nF" 0805 180.674,162.537 r0 top
C123 "100pF" 0805 85.509,157.645 r0 top
C124 "100pF" 0805 102.763,123.899 r270 top
C125 "100nF" 0805 83.191,121.187 r90 top
C125a "100nF" 0805 94.464,137.186 r90 top
C125b "100nF" 0805 85.371,139.493 r270 top
C125c "100nF" 0805 87.619,139.493 r270 top
C125d "100nF" 0805 80.736,139.493 r270 top
C125e "100nF" 0805 74.097,146.972 r90 top
C127 "100nF" 0805 53.327,76.298 r270 top
C128 "100nF" 0805 53.385,66.214 r270 top
C129 "2.2uF" 0805 47.444,73.742 r180 top
C130 "2.2uF" 0805 50.921,52.473 r270 top
C132 "100nF" 0805 125.115,116.735 r270 top
C133 "100nF" 0805 120.146,120.187 r0 top
C136 "100nF" 0805 117.415,61.276 r270 bottom
C200 "100nF" 0805 223.782,113.949 r180 top
C201 "100nF" 0805 216.16,103.636 r90 top
C500 "100nF" 0805 95.876,114.076 r270 top
D1 "PMEG6010CEH" SOD87 47.623,151.093 r90 bottom
D2 "PMEG6010CEH" SOD87 207.178,144.568 r0 top
D2a "SS34" DO214 211.974,140.567 r270 top locked
D3 "SS24" DO214 57.214,32.227 r0 top
D4 "SS24" DO214 56.515,90.654 r270 top
D5 "PMEG6010CEH" SOD87 147.865,104.407 r0 top
D6 "SS34" DO214 91.184,107.163 r0 top
D7 "1N5711W-7-F" SOD87 45.171,63.852 r90 top
D8 "1N5711W-7-F" SOD87 44.786,48.68 r90 top
D9 "PMEG6010CEH" SOD87 116.211,115.38 r90 top
D200 "PMEG6010CEH" SOD87 223.413,102.348 r270 top
D202 "PMEG6010CEH" SOD87 218.858,98.685 r180 top
E1 "ALPS-EC12E2420404" Encoder 191.144,53.332 r90 top locked
F1 "MC12CT" 1206 211.985,148.125 r90 top locked
F2 "MC12CT" 1206 97.202,106.674 r180 bottom locked
HS1 "RD16HHF1x2" TO-220_5_DUAL_HS 62,66.5 r180 bottom locked
J1RF "1373866" 1373866 161.65,157.639 r180 top locked
J2 "Mic" MX-387GL_new1 25.812,143 r270 bottom locked
J3RF "1373866" 1373866 53.291,162.78 r0 top locked
J4 "Phones" KLBR4 25.695,131.5 r270 bottom locked
J5 "Line Out" MX-387GL_new1 25.685,153 r270 bottom locked
J6 "Line In" MX-387GL_new1 25.66,163 r270 bottom locked
J7 "Paddles" MX-387GL_NEW1 25.669,120 r270 bottom locked
J8 "ACC" MX-387GL_NEW1 25.608,110 r270 bottom locked
J9 "1373826" 1373826 135.865,37.008 r180 bottom locked
J10 "219320-0001" MOLX_USB 220.726,153.98 r90 top locked
J11 "ANT1" CON-SMA-RA 29.489,50.48 r90 bottom locked
J12 "ANT2" CON-SMA-RA 29.489,76.48 r90 bottom locked
J13 "1373826" 1373826 117.678,37.008 r0 bottom locked
K1 "G6KU-2FY 3DC" Omron_2FY-Pro 146.228,54.737 r270 top locked
K2 "G6KU-2FY 3DC" Omron_2FY-Pro 147.269,67.005 r270 top locked
K3 "G6KU-2FY 3DC" Omron_2FY-Pro 168.3,66.269 r270 top
K4 "G6KU-2FY 3DC" Omron_2FY-Pro 146.228,41.192 r180 top locked
K5 "G6K-2FY 3DC" Omron_2FY 120.909,51.603 r0 bottom locked
L1 "2.2uH" 0805 143.927,127.334 r270 top
L2 "1uH" 0805 144.352,139.678 r90 top
L3 "0.47uH" 0805 144.326,146.714 r90 top
L4 "0.33uH" 0805 144.13,134.7 r270 top
L5 "4.7uH" 0805 155.357,127.334 r270 top
L6 "2.2uH" 0805 155.782,139.678 r90 top
L7 "1uH" 0805 155.756,146.714 r90 top
L8 "0.68uH" 0805 155.56,134.7 r270 top
L9 "2.2uH" 0805 159.167,127.334 r270 top
L10 "1uH" 0805 159.592,139.678 r90 top
L11 "0.47uH" 0805 159.566,146.714 r90 top
L12 "0.33uH" 0805 159.37,134.7 r270 top
L13 "T37-2" LPF_IND 178.939,34.955 r180 bottom locked
L14 "T37-2" LPF_IND 167.183,34.955 r180 bottom locked
L15 "T37-2" LPF_IND 155.254,34.955 r180 bottom locked
L16 "T37-2" LPF_IND 135.865,51.816 r90 bottom locked
L17 "T37-2" LPF_IND 135.915,63.754 r90 bottom locked
L18 "T37-2" LPF_IND 135.915,75.463 r90 bottom locked
L19 "T37-2" LPF_IND 155.143,63.5 r0 bottom locked
L20 "T37-2" LPF_IND 167.055,63.551 r0 bottom locked
L21 "T37-2" LPF_IND 178.866,63.551 r0 bottom locked
L22 "T37-2" LPF_IND 178.993,49.251 r180 bottom locked
L23 "T37-2" LPF_IND 167.183,49.225 r180 bottom locked
L24 "T37-2" LPF_IND 155.331,49.209 r180 bottom locked
L25 "T37-2" LPF_IND 155.016,76.962 r0 bottom locked
L26 "T37-2" LPF_IND 167.163,76.962 r0 bottom locked
L27 "T37-2" LPF_IND 179.426,77.064 r0 bottom locked
L28 "47uH" CD75 77.869,41.937 r90 top
L29 "47uH" CD75 66.208,69.271 r0 top
LD1 "USB" 1206_Elec_Cap 205.861,137.309 r270 top
LD2 "PACK" 1206_Elec_Cap 217.393,91.436 r270 top
LD3 "LOCK" 1206_Elec_Cap 216.337,119.427 r90 top
LD4 "5V" 1206_Elec_Cap 56.99,56.063 r90 top
LD5 "8V" 1206_Elec_Cap 82.75,85.82 r270 top
M1 "0" 0805 134.566,127.386 r270 top
M2 "0" 0805 126.641,142.296 r180 top
M3 "0" 0805 171.663,121.957 r0 top
M4 "0" 0805 180.157,144.421 r270 top
M5 "0" 0805 175.492,148.082 r180 top
M6 "0" 0805 175.492,150.319 r180 top
M7 "0" 0805 169.061,113.809 r90 top
M8 "0" 0805 174.168,113.817 r90 top
M9 "0" SB_0603_10 210.007,127.322 r180 top net-tie value=1K
M9a "0" SB_0603_10 81.255,155.169 r180 top net-tie value=1K
M9b "0" SB_0603_10 81.255,157.013 r180 top net-tie value=1K
M9c "0" SB_0603_10 96.044,155.305 r180 top net-tie value=1K
M9d "0" SB_0603_10 89.497,144.717 r90 top net-tie value=1K
M9e "0" SB_0603_10 87.625,144.749 r90 top net-tie value=1K
M9f "0" SB_0603_10 85.749,144.78 r90 top net-tie value=1K
M9i "0" SB_0603_10 96.044,151.581 r180 top net-tie value=1K
M9j "0" SB_0603_10 81.998,147.835 r180 top net-tie value=1K
M9k "0" SB_0603_10 81.998,149.737 r0 top net-tie value=1K
M9m "0" SB_0603_10 83.932,144.78 r270 top net-tie value=1K
M9p "0" SB_0603_10 96.101,149.737 r180 top net-tie value=1K
M9u "0" SB_0603_10 96.044,153.447 r180 top net-tie value=1K
M9x "0" SB_0603_10 93.212,144.717 r90 top net-tie value=1K
M9z "0" SB_0603_10 91.33,144.749 r90 top net-tie value=1K
M10 "0" 0805 120.141,122.654 r0 top
M11 "0" 0805 127.996,47.298 r90 top
M12 "0" 0805 155.456,35.523 r270 top
M13 "0" 0805 197.411,115.362 r90 top
M14 "0" 0805 199.916,122.551 r270 top
M15 "0" 0805 202.382,122.551 r270 top
M16 "0" 0805 204.845,122.551 r270 top
M17 "0" 0805 207.396,122.551 r270 top
M18 "0" 0805 88.154,33.328 r90 top
M19 "0" 0805 88.154,40.573 r270 top
M20 "0" 0805 57.087,52.642 r0 top
M21 "0" 0805 76.586,91.022 r270 top
M22 "0" 0805 50.642,76.298 r270 top
M23 "0" 0805 50.927,63.826 r90 top
M200 "0" 0805 216.109,142.371 r90 top locked
P1 "Fan" MHDR1X2_M 52.248,152.375 r270 bottom
Q1 "IRLML6244TRPBF" SOT-23-Pro 48.702,145.965 r180 bottom
Q2 "IRLML6244TRPBF" SOT-23-Pro 171.111,105.318 r270 top
Q3 "IRLML6244TRPBF" SOT-23-Pro 90.602,45.949 r90 top
Q4 "RD16HHF1" TO-220C 106.3,78.5 r90 bottom locked
Q5 "RD16HHF1" TO-220C 106.3,54.5 r90 bottom locked
Q6 "AOD472" TO-252 80.337,115.748 r270 bottom locked
Q7 "AOD472" TO-252 94.895,115.748 r270 bottom locked
Q8 "IRLML6244TRPBF" SOT-23-Pro 122.233,114.417 r90 top
Q8a "IRLML6244TRPBF" SOT-23-Pro 74.083,143.469 r270 top
R1 "100K" 0805 132.321,127.386 r270 top
R2 "100K" 0805 180.207,139.595 r270 top
R3 "4.7K" 0805 130.033,127.386 r270 top
R4 "4.7K" 0805 136.81,125.048 r90 top
R5 "4.7K" 0805 182.651,137.265 r90 top
R6 "4.7K" 0805 182.651,142.091 r90 top
R7 "4.7K" 0805 126.649,137.823 r180 top
R8 "4.7K" 0805 124.32,135.576 r0 top
R9 "4.7K" 0805 180.207,126.747 r0 top
R10 "4.7K" 0805 182.597,124.329 r180 top
R11 "100K" 0805 124.311,140.057 r0 top
R12 "100K" 0805 182.622,121.967 r180 top
R13 "4.7k" 0805 52.175,145.829 r90 bottom
R13a "2.2/1206" 1206 57.475,140.923 r90 bottom
R13b "2.2/1206" 1206 57.551,148.441 r90 bottom
R13e "1k" 0805 54.468,145.594 r270 bottom
R14 "47K" 0805 32.786,135.404 r270 top
R15 "100" 0805 32.695,138.23 r90 top
R16 "100" 0805 34.329,123.525 r180 top
R17 "100" 0805 32.008,113.846 r90 top
R18 "100" 0805 31.973,108.808 r270 top
R19 "1.5k" 0805 173.427,100.164 r180 top
R20 "4.7K" 0805 168.346,102.736 r270 top
R21 "27" 1206 211.874,98.371 r270 top
R22 "27" 1206 208.497,98.371 r270 top
R23 "27" 1206 205.038,98.371 r270 top
R24 "27" 1206 201.505,98.371 r270 top
R25 "27" 1206 197.794,98.371 r270 top
R26 "27" 1206 194.347,98.371 r270 top
R27 "27" 1206 190.985,98.371 r270 top
R28 "27" 1206 187.663,98.371 r270 top
R29 "10k" 0805 217.351,133.063 r90 top
R30 "1k" 0805 219.843,135.401 r270 top
R34 "1k" 0805 219.538,120.855 r90 top
R34g "10k" 0805 217.446,94.671 r180 top
R34h "10k" 0805 205.845,140.55 r0 top
R35 "1k" 0805 71.342,48.208 r90 top
R36 "3.3k" 0805 73.731,50.537 r270 top
R36A "2.2k" 0805 57.087,48.098 r0 top
R37 "1k" 0805 72.707,76.563 r0 top
R38 "5.6k" 0805 75.044,74.174 r180 top
R38a "4.7k" 0805 78.972,91.022 r270 top
R39 "1K" 0805 96.593,45.98 r180 top
R40 "4.7K" 0805 94.255,50.586 r0 top
R41 "4.7K" 0805 90.421,40.573 r270 top
R42 "1K" 0805 144.025,94.593 r180 top
R43 "1K" 0805 136.881,94.584 r0 top
R44 "1K" 0805 134.595,97.835 r0 top
R45 "100" 0805 142.195,100.715 r90 top
R46 "100" 0805 142.184,108.175 r270 top
R47 "1K" 0805 134.595,110.82 r0 top
R48 "4.7" 0805 126.953,101.747 r0 top
R49 "4.7" 0805 126.975,106.832 r0 top
R50 "220" 0805 111.506,85.823 r270 top
R51 "220" 0805 115.33,47.109 r90 top
R52 "750" 0805 109.007,83.493 r90 top
R53 "750" 0805 109.901,51.949 r0 top
R54 "10" 0805 120.806,78.988 r0 top
R55 "2.2k" 0805 195.981,157.092 r270 top
R56 "2.2k" 0805 207.233,157.07 r270 top
R57 "1K" 0805 188.806,135.839 r90 top
R58 "1K" 0805 200.394,135.817 r90 top
R60 "15K" 0805 53.936,152.375 r90 top
R61 "10K" 0805 106.096,67.668 r270 bottom locked
R62 "100" 0805 109.778,125.261 r270 top
R63 "100" 0805 123.517,164.775 r180 top
R63a "100" 0805 103.485,110.232 r270 bottom
R64 "100" 0805 134.569,164.806 r0 top
R65 "100" 0805 169.597,164.725 r180 top
R66 "100" 0805 180.674,164.764 r0 top
R67 "100" 0805 203.708,164.823 r0 top
R68 "0.001" 2512 212.952,164.815 r0 top locked
R69 "100" 0805 211.985,159.726 r0 top
R70 "2.2k" 0805 78.099,127.631 r270 top
R70a "2.2k" 0805 81.041,142.538 r180 top
R71 "100" 0805 100.528,117.707 r90 bottom
R72 "4.7k" 0805 90.396,124.622 r0 top
R73 "1k" 0805 83.163,118.612 r0 top
R74 "100" 0805 101.493,148.613 r0 top
R75 "100" 0805 101.493,146.357 r0 top
R76 "100" 0805 101.493,144.058 r0 top
R76a "10K" 0805 88.842,109.643 r180 bottom locked
R76f "1k" 0805 71.296,146.972 r90 top
R79 "47" 0805 48.305,66.138 r270 top
R80 "2.2k" 0805 47.469,70.922 r180 top
R81 "47" 0805 41.281,48.721 r90 top
R82 "2.2k" 0805 48.305,52.422 r270 top
R85 "4.7k" 0805 124.533,110.927 r180 top
R200 "100" 0805 223.891,108.893 r90 top
R201 "4.7K" 0805 221.668,108.893 r90 top
R202 "2.2K" 0805 218.385,103.636 r90 top
R203 "2.2K" 0805 220.597,105.973 r270 top
R500 "5.6k" 0805 91.184,111.738 r90 top
R501 "1k" 0805 93.57,114.076 r270 top
RFC1 "47uH" BIG_IND 99.314,36.982 r180 top
RFC2 "47uH" CD75 65.747,51.486 r180 top
RFC3 "47uH" CD75 76.652,83.174 r90 top
RFC4 "BN43-2402 2T choke" F_Bead_Flat 70.593,96.903 r270 top
RFC5 "BN43-2402 2T choke" F_BEAD 121.864,81.051 r180 bottom locked
RFC6 "47uH" 0805 191.061,138.172 r270 top
RFC7 "47uH" 0805 198.148,138.172 r270 top
RFC8 "47uH" 0805 47.444,76.282 r180 top
RFC9 "47uH" 0805 50.921,57.654 r270 top
RFC200 "22uH" 0805 218.379,113.949 r180 top
T1 "CX2074NL" SOP5_NEW1 156.845,116.103 r270 top locked
T2 "CX2074NL" SOP5_NEW1 83.298,67.209 r90 top
T3 "1:3 BN-43-3312" PA_OUT_TRM 109.469,67.213 r0 top locked
T4 "FT50-43 10:1 ratio" "SWR_TR _new" 33.938,39.153 r45 top locked
T5 "FT50-43 10:1 ratio" "SWR_TR _new" 33.821,63.852 r45 top locked
TF1 "Turbine Fan 5V" TFAN 84,147 r180 bottom locked
U1 "SN74CBT3253C" SO-16 137.058,133.375 r180 top locked
U2 "SN74CBT3253C" SO-16 177.286,131.982 r180 top locked
U3 "74HCT02" SO-14 157.709,108.483 r0 top
U4 "LTV-816S" SMDIP-4_new1 168.427,95.453 r180 top
U5 "SN74LS145D" SO-16 199.187,105.787 r90 top
U6 "CH224K" CH224K 218.567,128.415 r0 top locked
U7 "LM2596S" TO-263-5 64.187,41.025 r0 top
U8 "LM2596S" TO-263-5 65.3,83.717 r270 top
U9 "OPA2674" SO-14-PRO 138.405,100.482 r180 top
U10 "LM2931CDG" SO-8-PRO 195.986,147.828 r180 top
U11 "LM2931CDG" SO-8-PRO 207.239,147.828 r180 top
U12 "BQ40Z80RSMR" QFN40P400X400X100-33N-D 88.455,150.737 r0 top
U200 "MT3608" SOT25-6 218.319,109.851 r90 top

## Footprints (in the part's own frame and the unit in brackets; to place one, negate y for a bottom-side part, rotate by r counter-clockwise, add the part's x,y. Pads: shape width x height; smd on the part's side, far side on the other; paste and mask are expansions set on the pad)
0805 [mil]
  rect 55x45 smd: 1(0.86,0.22) 2(90.86,0.22)
  silkscreen extent -40,-35 132,36
1206 [mil]
  rect 60x60 smd: 1(0.86,0.22) 2(135.86,0.22)
  silkscreen extent -49,-50 186,50
1206_Elec_Cap [mil]
  rect 60x60 smd: 1(0.86,0.22) 2(135.86,0.22)
  silkscreen extent -70,-70 186,50
2512 [mm]
  rect 2x3.81 smd: 1(0.022,0.006) 2(6.25,0.006)
  silkscreen extent -1.25,-2.25 7.5,2.25
1373826 [mm]
  rect 0.8x1.1 smd: A1(-1.27,2.75) A2(0,2.75) A3(1.27,2.75) B1(-1.27,-2.75) B2(0,-2.75) B3(1.27,-2.75)
  round 0.8 hole 1.6 unplated: MH1(-3.48,0) MH2(3.48,0)
  rect 1.2x2.75 smd: MP1(-3.78,2.425) MP2(-3.78,-2.425) MP3(3.78,-2.425) MP4(3.78,2.425)
  silkscreen extent -2.8,-2.1 2.8,3.7
1373866 [mm]
  rect 0.8x1.1 smd: A1(-5.715,2.75) A2(-4.445,2.75) A3(-3.175,2.75) A4(-1.905,2.75) A5(-0.635,2.75) A6(0.635,2.75) A7(1.905,2.75) A8(3.175,2.75) A9(4.445,2.75) A10(5.715,2.75) A11(-5.715,-2.75) A12(-4.445,-2.75) A13(-3.175,-2.75) A14(-1.905,-2.75) A15(-0.635,-2.75) A16(0.635,-2.75) A17(1.905,-2.75) A18(3.175,-2.75) A19(4.445,-2.75) A20(5.715,-2.75)
  round 0.8 hole 1.6 unplated: MH1(-7.925,0) MH2(7.925,0)
  rect 1.2x2.75 smd: MP1(-8.225,2.425) MP2(8.225,2.425) MP3(-8.225,-2.425) MP4(8.225,-2.425)
  silkscreen extent -7.2,-2.1 7.2,4.1
BATT_HOLDER_5S [mm] "21700 Battery Holder"
  round 3.75 hole 2.5: 1(-33.5,36) 2(-33.5,-41) 3(-10.5,36) 4(-10.5,-41) 5(12.5,36) 6(12.5,-41) 7(35.5,36) 8(35.5,-41) 9(58.5,36.25) 10(58.5,-41)
  rect 1.27x1.524 smd: 11(58.598,1.104) 12(58.598,-1.182) 13(12.581,1.144) 14(12.581,-1.142) 15(-33.355,1.138) 16(-33.355,-1.148)
  silkscreen extent -45.09,-43.98 69.93,38.75
BIG_IND [mm] "power inductor large"
  rect 3x6 smd: 1(-5.5,0.006) 2(5.5,0)
  silkscreen extent -6.25,-6.25 6.25,6.25
CAP_ALUM_Pro [mm]
  rect 3x1 smd: 1(-3,0) 2(3,0)
  silkscreen extent -4.32,-3.3 3.33,3.3
CD75 [mm] "AliExpress Power inductor"
  rect 2.54x6.35 smd: 1(-2.604,-0.011) 2(2.655,0.052)
  silkscreen extent -3.81,-3.81 3.81,3.81
CH224K [mm] "unknown"
  rect 2.3x3.2 smd: 0(0,0)
  oval 1.65x0.5 smd: 1(3,-2) 2(3,-1) 3(3,0) 4(3,1) 5(3,2) 6(-3,2) 7(-3,1) 8(-3,0) 9(-3,-1) 10(-3,-2)
  silkscreen extent -1.75,-3.3 2.03,2.5
CON-SMA-RA [mil] "Connector, SMA Female, 5-Lead, Thru-Hole, Right-Angle, Body 7x7mm"
  round 100 hole 60: 1(0,0) 2(-100,-100) 2(-100,100) 2(100,-100) 2(100,100)
  silkscreen extent -146,-146 146,146
DO214 [mm]
  rect 1.96x3.39 smd: 1(0.012,0.006) 2(6.25,0)
  silkscreen extent -1.5,-2.25 7.85,2.25
Encoder [mil] "Alps Rotary Encoder"
  oval 110.24x130 hole 85: 1(-246.06,0) 2(246.06,0)
  round 62 hole 40: A(-98.43,-295.28) B(98.43,-295.28) C(0,-295.28)
  silkscreen extent -245,-260 247,260
F_BEAD [mil] "Ferrite bead choke, 1t, BN43-2402"
  rect 62x62 hole 40: 1(-49.21,0)
  round 62 hole 40: 2(50.79,0)
  silkscreen extent -148,-98 148,98
F_Bead_Flat [mil] "Ferrite bead choke, 1t, BN43-2402"
  round 62 hole 40: 1(50.79,0)
  rect 62x62 hole 40: 2(-49.21,0)
  silkscreen extent -157,-394 157,49
KLBR4 [mm] "Lumberg KLBR4 phones receptacle"
  round 2.54 hole 1.8: B(-2.2,-9.5) S(-2.2,-2.2)
  round 2 hole 1.27: R(-4.5,-11.8) T(4.5,-10.5)
  silkscreen extent -5.73,-12.09 6,0
LPF_IND [mm] "T37-2 inductor"
  round 1.5 hole 0.9: 1(-2.5,3.75) 2(2.5,3.75)
  silkscreen extent -5.5,-5.5 5.5,5.5
MHDR1X2_M [mm] "Connector; Header; 2 Position"
  rect 1x1 hole 0.6: 1(0,0)
  round 1 hole 0.6: 2(1.27,0)
  silkscreen extent -1.39,-1.37 2.67,1.37
MOLX_USB [mm]
  rect 0.3x0.85 smd: A1(-3.378,2) A4(-2.547,2) A5(-1.25,2) A6(-0.25,2) A7(0.25,2) A8(1.25,2) A9(2.549,2) A12(3.384,2) B1(3.079,2) B4(2.25,2) B5(1.75,2) B6(0.75,2) B7(-0.75,2) B8(-1.75,2) B9(-2.25,2) B12(-3.077,2)
  round 1.4 hole 1: MH3(-5.75,0.5) MH4(5.75,0.5)
  round 1.5 hole 1.25: MH5(5.75,-3.5) MH6(-5.75,-3.5)
  Keep-Out Layer board cut-out: 4.5,-4.676 4.5,1.27 -4.5,1.27 -4.5,-4.676
  Keep-Out Layer lines w0.127: -4.5,1.27 -4.5,-4.676 4.5,-4.676 4.5,1.27 -4.5,1.27
  silkscreen extent -6.69,-4 6.71,2.15
MX-387GL_new1 [mm] "Pro Signal 3pin receptacle"
  round 1.6 hole 1.6 unplated: 0(0,-8.9) 0(0,-1.74)
  round 2 hole 1.27: R(3,-11.5) S(-3,-11.5) T(-3.5,-3.5) T(3.5,-3.5)
  silkscreen extent -4.75,-12.75 4.75,0
MX-387GL_NEW1 [mm] "Pro Signal 3pin receptacle"
  round 1.6 hole 1.6 unplated: 0(0,-8.9) 0(0,-1.74)
  round 2 hole 1.27: R(3,-11.5) S(-3,-11.5) T(-3.5,-3.5) T(3.5,-3.5)
  silkscreen extent -4.75,-12.75 4.75,0
Omron_2FY [mm] "Omron SMD relay"
  rect 1.8x0.9 smd: 1(-3.5,3.8) 2(-3.5,0.6) 3(-3.5,-1.6) 4(-3.5,-3.8) 5(3.5,-3.8) 6(3.5,-1.6) 7(3.5,0.6) 8(3.5,3.8)
  silkscreen extent -4.8,-5.4 4.8,5.4
Omron_2FY-Pro [mm] "Omron SMD relay"
  rect 2.4x0.9 smd: 1(-3.2,3.8) 2(-3.2,0.6) 3(-3.2,-1.6) 4(-3.2,-3.8) 5(3.2,-3.8) 6(3.2,-1.6) 7(3.2,0.6) 8(3.2,3.8)
  silkscreen extent -4.8,-5.4 4.8,5.4
PA_OUT_TRM [mm] "transformer 1:3, 5 pin, BN43-3312"
  rect 3.5x3.5 hole 2: 1(-14,4.5)
  round 3.5 hole 2: 2(14,0) 3(-14,-4.5) 4(14,4.5) 5(14,-4.5)
  silkscreen extent -16.25,-10 16.25,10
QFN40P400X400X100-33N-D [mm]
  rect 0.8x0.2 smd: 1(-2.095,1.4) 2(-2.098,1) 3(-2.095,0.6) 4(-2.098,0.2) 5(-2.098,-0.2) 6(-2.098,-0.6) 7(-2.098,-1) 8(-2.098,-1.4) 17(2.159,-1.4) 18(2.159,-1) 19(2.159,-0.6) 20(2.159,-0.2) 21(2.159,0.2) 22(2.159,0.6) 23(2.159,1) 24(2.159,1.4)
  rect 0.2x0.8 smd: 9(-1.4,-2.159) 10(-1,-2.159) 11(-0.6,-2.159) 12(-0.2,-2.159) 13(0.2,-2.159) 14(0.6,-2.159) 15(1,-2.159) 16(1.4,-2.159) 25(1.4,2.159) 26(1,2.159) 27(0.6,2.159) 28(0.2,2.159) 29(-0.2,2.159) 30(-0.6,2.159) 31(-1,2.159) 32(-1.4,2.159)
  rect 1.45x1.45 smd: 33(0,0)
  silkscreen extent -2.47,1.9 -2.27,2.1, body extent -2.05,-2.05 2.05,2.05, height 1
SB_0603_10 [mil] "Jumper"
  rect 32x40 smd: 1(33.75,0) 2(-33.75,0)
  Top Layer region: 23.75,20 13.75,20 -6.25,0 13.75,-20 23.75,-20
  Top Layer region: -26.25,0 -16.25,0 3.75,20 -26.25,20
  Top Layer region: -26.25,0 -16.25,0 3.75,-20 -26.25,-20
  Top Layer lines w10: 33.75,0 -33.75,0
SMDIP-4_new1 [mm] "4 pin SMD DIP, pitch 2.54mm"
  oval 2x1.5 smd: 1(-5,1.27) 2(-5,-1.27) 3(5,-1.27) 4(5,1.27)
  silkscreen extent -6.15,-3 6.15,3
SO-8-PRO [mil]
  oval 80x24 smd: 1(0,0) 2(0,-50) 3(0,-100) 4(0,-150) 5(220,-150) 6(220,-100) 7(220,-50) 8(220,0)
  silkscreen extent 60,-179 160,35
SO-14 [mil]
  oval 80x24 smd: 1(0,0) 2(0,-50) 3(0,-100) 4(0,-150) 5(0,-200) 6(0,-250) 7(0,-300) 8(220,-300) 9(220,-250) 10(220,-200) 11(220,-150) 12(220,-100) 13(220,-50) 14(220,0)
  silkscreen extent 59,-335 161,38
SO-14-PRO [mil]
  oval 80x24 smd: 1(0,0) 2(0,-50) 3(0,-100) 4(0,-150) 5(0,-200) 6(0,-250) 7(0,-300) 8(220,-300) 9(220,-250) 10(220,-200) 11(220,-150) 12(220,-100) 13(220,-50) 14(220,0)
  silkscreen extent 59,-335 161,38
SO-16 [mil]
  oval 80x24 smd: 1(0,0) 2(0,-50) 3(0,-100) 4(0,-150) 5(0,-200) 6(0,-250) 7(0,-300) 8(0,-350) 9(220,-350) 10(220,-300) 11(220,-250) 12(220,-200) 13(220,-150) 14(220,-100) 15(220,-50) 16(220,0)
  silkscreen extent 59,-385 160,40
SOD87 [mil]
  rect 50x70 smd: 1(0.46,0.23) 2(145.46,0.23)
  silkscreen extent -45,-55 201,55
SOP5_NEW1 [mm] "Small Outline; 6 Leads (1 Absent); Body Width 6.9 mm; Pitch 2 mm"
  rect 0.8x1.4 smd: 1(-2,-2.9) 2(0,-2.9) 3(2,-2.9) 4(2,2.9) 6(-2,2.9)
  silkscreen extent -3.87,-1.75 3,1.75
SOT25-6 [mm] "6 lead package"
  rect 1.05x0.6 smd: 1(-1.35,0.95) 2(-1.35,0) 3(-1.35,-0.95) 4(1.35,-0.95) 5(1.35,0) 6(1.35,0.95)
  silkscreen extent -1.75,-1.75 1.25,1.87
SOT-23-Pro [mil]
  rect 36x36 smd: 1(0.39,0.34) 2(75.39,0.34)
  rect 36x50 smd: 3(38.39,80.34)
  silkscreen extent -75,-40 150,125
"SWR_TR _new" [mm] "FT50-43 10:1 transformer"
  round 1.5 hole 0.9: 1(-5,4) 2(5,4)
  round 2 hole 1.5: 3(0,6.5) 4(0,0) 5(0,-2.25)
  silkscreen extent -8,-8 8,8
TFAN [mm] "Turbo Fan 5V"
  round 3 hole 2.8 unplated: 1(-17.5,18) 2(17.5,18) 3(17.5,-17)
  silkscreen extent -20,-20.01 20,20
TO-220_5_DUAL_HS [mm] "Dual MOSFET and heatsink"
  oval 4x6 hole 5 slot 3 at 0 deg: 1(-39.4,20) 2(-39.4,-20)
  silkscreen extent -42.5,-38 26,38
TO-220C [mm] "TO, Thru-Hole, Vertical, Heatsink Mounted; 3 In-Line Leads; Pitch 2.54 mm"
  round 1.6 hole 1: 1(2.54,0) 2(0,0)
  rect 1.6x1.6 hole 1: 3(-2.54,0)
  silkscreen extent -4,-1.25 3.75,1.25
TO-252 [mm] "Plastic flagne mount package"
  rect 3.2x1 smd: 1(-5.6,2.2) 3(-5.6,-2.2)
  rect 6.2x5.4 smd: 2(1.5,0)
  silkscreen extent -7.6,-3.85 4.8,3.85
TO-263-5 [mil]
  rect 118.11x42 smd: 1(251,-133.46) 2(251,-66.46) 3(251,0) 4(251,67.54) 5(251,134.54)
  rect 354.33x401.57 smd: 3(-137.8,0)
  silkscreen extent -335,-217 315,217